# Altium PCB PCB_CSN_V4_1.PcbDoc
Units mil, origin at the board's own origin, x right, y up, seen from the top; angles counter-clockwise.
Board outline 3160 x 2075 mil, 2 copper layers (Top Layer, Bottom Layer); 94 components, 66 nets, 329 pads, 33 vias.
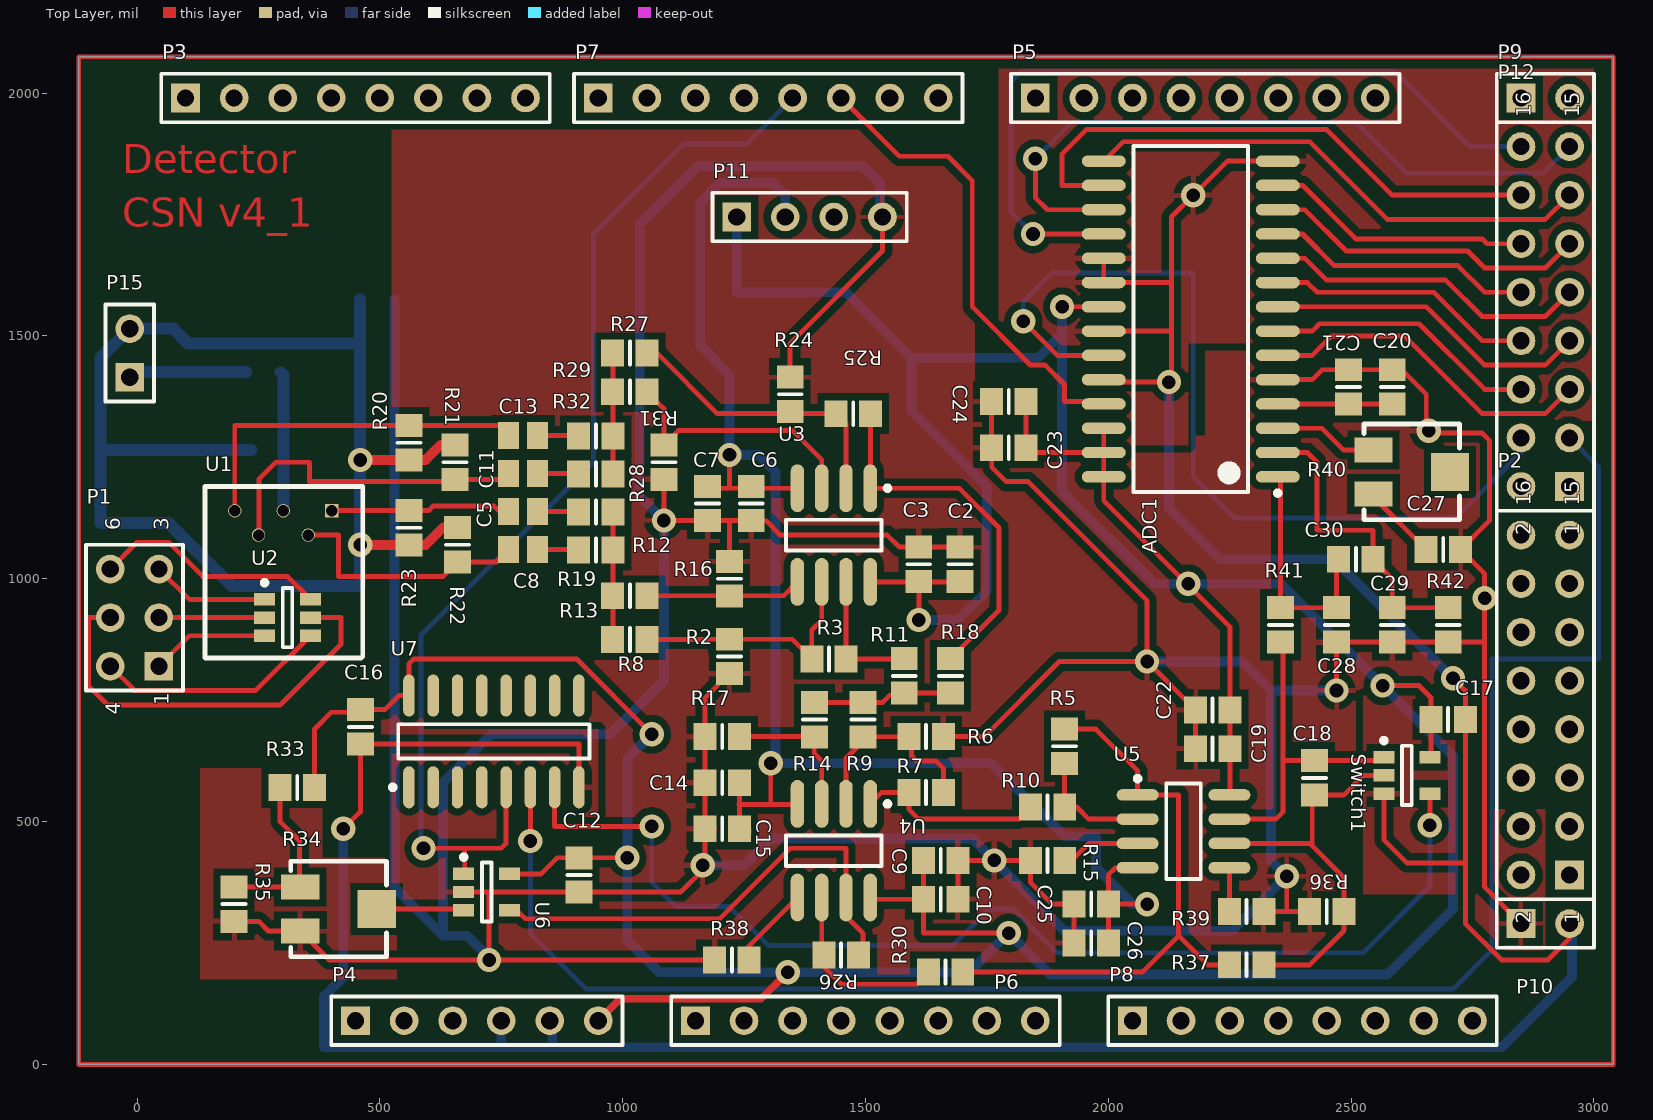
[diagram p0: Top Layer view]
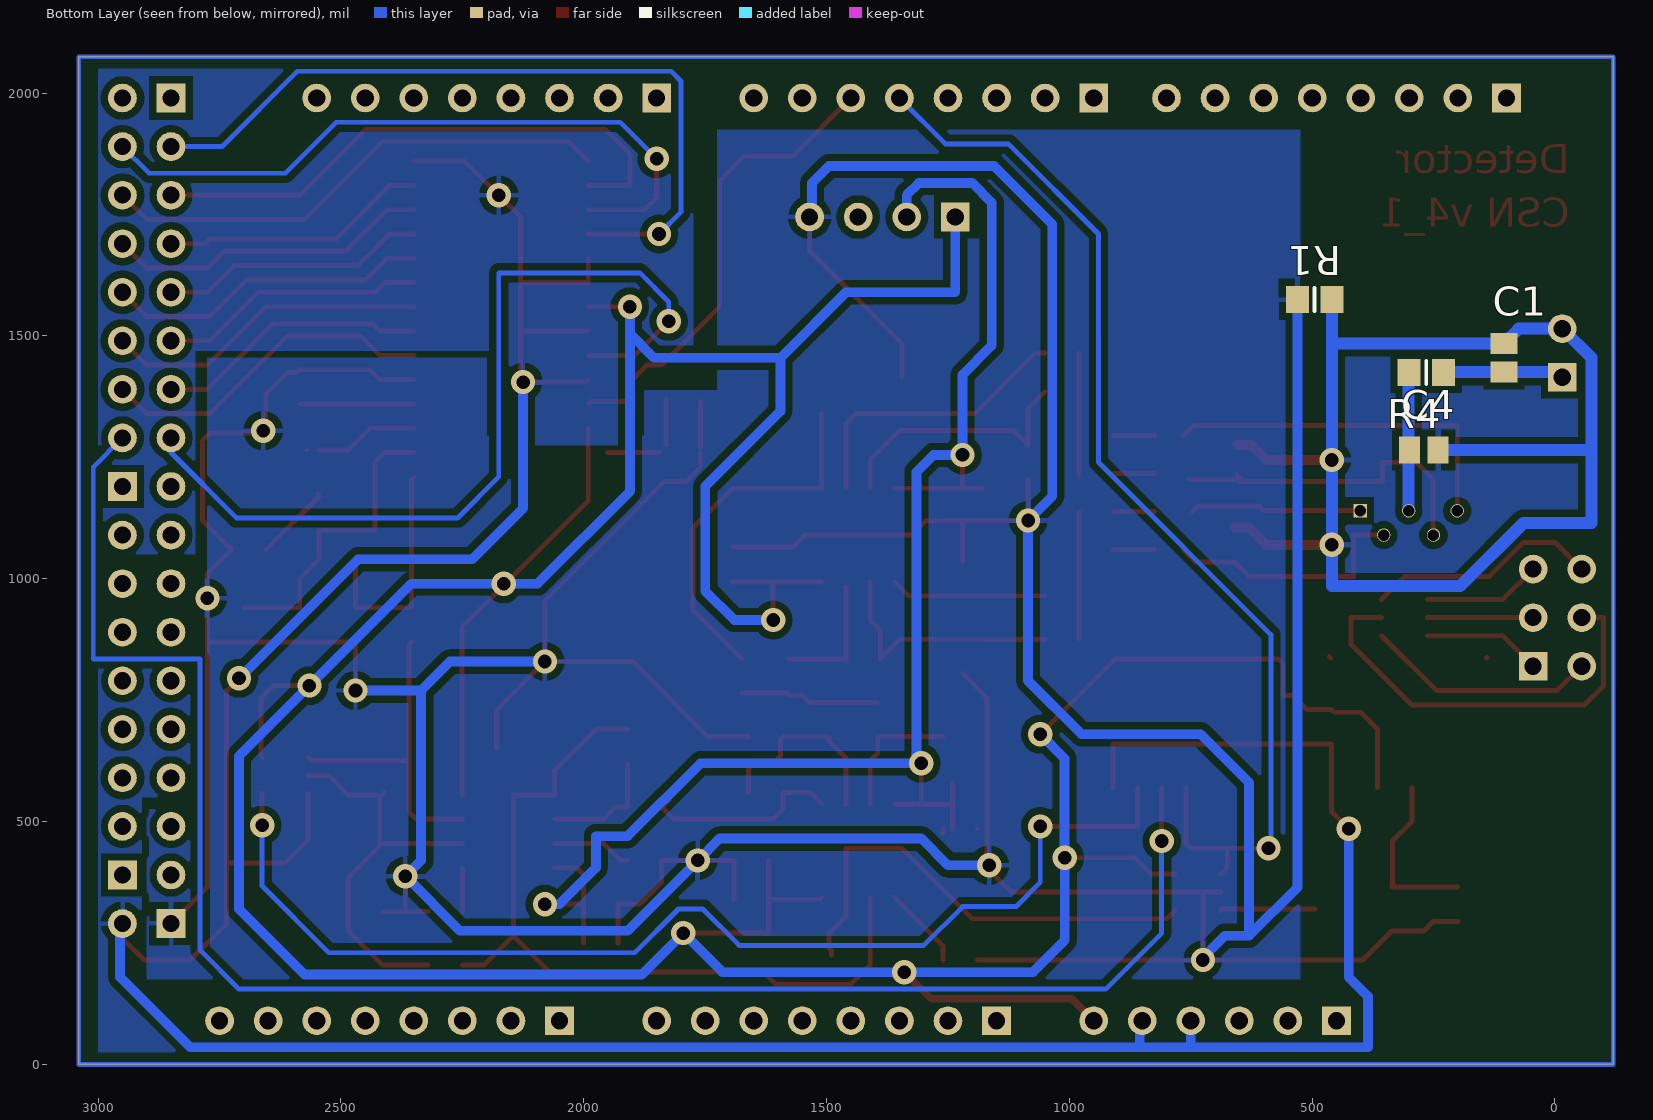
[diagram p1: Bottom Layer view, seen from below]

## Layer stack, top to bottom
Top Layer: signal copper 1.4
Dielectric: dielectric 12.6, FR-4, Dk 4.8
Bottom Layer: signal copper 1.4

## Board outline
-120,0 -120,2075 3040,2075 3040,0 -120,0

## Design rules (kind name [scope] priority, off if disabled: settings)
Clearance Clearance_1 [InPolygon] p1: gap=15
Clearance [InNetClass('All Nets') vs InNetClass('All Nets')] p2: gap=5
ComponentClearance ComponentClearance_1 [All] p1: gap=10 collisioncheckmode=3 verticalgap=10 showdistances=FALSE
PolygonConnect [All] p1: connectstyle=Relief reliefconductorwidth=10 reliefentries=4 polygonreliefangle="90 Angle"
RoutingVias [All] p1: holewidth=28 width=50 viastyle="Through Hole" minholewidth=28 minwidth=50 maxholewidth=28 maxwidth=50
SilkscreenOverComponentPads [All] p1: minsilkscreentomaskgap=10
SolderMaskExpansion [All] p1: expansion=4
Width Width_2 [(InNet('-5') OR InNet('+5') OR InNet('GND') OR InNet('DGND'))] p1: maxlimit=20 minlimit=10 preferedwidth=15 minimp=50.000000 maximp=50.000000 favimp=50.000000
Width [(InNet('70_GND') OR InNet('+70V') OR InNet('NetC4_2'))] p2: maxlimit=25 minlimit=20 preferedwidth=20 minimp=50.000000 maximp=50.000000 favimp=50.000000
Width Width_1 [All] p3: maxlimit=10 minlimit=10 preferedwidth=10
26 further rules are at their usual default settings.

## Classes and differential pairs
net class potencia: +5 -5 GND
component class Logica_ADC: ADC1 C16 C17 C18 C19 C20 C21 C22 C23 C24 C25 C26 C27 C28 C29 C30 P2 P3 P4 P5 P6 P7 P8 P9 P10 P11 P12 R36 R37 R39 R40 R41 R42 Switch1 U7
component class Acond_Elec: C1 C2 C3 C4 C5 C6 C7 C8 C9 C10 C11 C12 C13 C14 C15 P1 P15 R1 R2 R3 R4 R5 R6 R7 R8 R9 R10 R11 R12 R13 R14 R15 R16 R17 R18 R19 R20 R21 R22 R23 R24 R25 R26 R27 R28 R29 R30 R31 R32 R33 R34 R35 R38 U1 U2 U3 U4 U5 U6
net class analog: NetADC1_4 NetC18_2 NetR26_2 NetR33_2 NetR34_W
net class digital: DGND NetADC1_18 NetADC1_23 NetADC1_25 NetSwitch1_4

## Components (designator, comment, footprint, x,y, rotation, side; value= is the part's Value field where it differs from the comment)
ADC1 "LTC1415" SO28_N 2170,1535 r180 top
C1 "Cap" C0805 105,1455 r270 bottom
C2 "Cap" 6-0805_N 1695,1030 r270 top
C3 "Cap Pol3" 6-0805_N 1610,1030 r90 top
C4 "Cap" C0805 270,1265 r0 bottom
C5 "Cap" C0805 795,1138.33 r0 top locked
C6 "Cap" 6-0805_N 1265,1155 r90 top
C7 "Cap Pol3" 6-0805_N 1175,1155 r90 top
C8 "Cap" C0805 795,1060 r0 top locked
C9 "Cap Pol3" 6-0805_N 1655,420 r0 top
C10 "Cap" 6-0805_N 1655,340 r180 top
C11 "Cap" C0805 795,1216.67 r0 top locked
C12 "Cap" 6-0805_N 910,390 r270 top
C13 "Cap" C0805 795,1295 r0 top locked
C14 "Cap" 6-0805_N 1205,580 r180 top
C15 "Cap Pol3" 6-0805_N 1205,485 r0 top
C16 "Cap" 6-0805_N 460,695 r270 top
C17 "Cap" 6-0805_N 2700,710 r180 top
C18 "Cap" 6-0805_N 2425,590 r90 top
C19 "Cap" 6-0805_N 2215,650 r0 top
C20 "Cap Pol3" 6-0805_N 2585,1395 r90 top
C21 "Cap" 6-0805_N 2495,1395 r270 top
C22 "Cap Pol3" 6-0805_N 2215,730 r180 top
C23 "Cap Pol3" 6-0805_N 1795,1270 r180 top
C24 "Cap" 6-0805_N 1795,1365 r0 top
C25 "Cap" 6-0805_N 1965,330 r180 top
C26 "Cap Pol3" 6-0805_N 1965,250 r0 top
C27 "Cap" 6-0805_N 2690,1060 r0 top
C28 "Cap" 6-0805_N 2470,905 r90 top
C29 "Cap" 6-0805_N 2585,905 r90 top
C30 "Cap" 6-0805_N 2510,1040 r180 top
P1 "Header 3X2A" HDR2X3_CEN 45,820 r90 top
P2 "Header 8X2" HDR2X8 2950,390 r90 top
P3 "Header 8" HDR1X8 100,1990 r0 top
P4 "Header 6" HDR1X6 450,90 r0 top
P5 "Header 8" HDR1X8 1850,1990 r0 top
P6 "Header 8" HDR1X8 1150,90 r0 top
P7 "Header 8" HDR1X8 950,1990 r0 top
P8 "Header 8" HDR1X8 2050,90 r0 top
P9 "Header 2" HDR1X2 2850,1990 r0 top
P10 "Header 2" HDR1X2 2850,290 r0 top
P11 "Header 4" HDR1X4 1235,1745 r0 top
P12 "Header 8X2" HDR2X8 2950,1190 r90 top
P15 "Header 2" HDR1X2 -15,1415 r90 top
R1 "Res3" 6-0805_N 495,1575 r180 bottom
R2 "Res3" 6-0805_N 1220,840 r90 top
R3 "Res3" 6-0805_N 1425,835 r180 top
R4 "Res3" 6-0805_N 265,1425 r180 bottom
R5 "Res3" 6-0805_N 1910,655 r90 top
R6 "Res3" 6-0805_N 1625,675 r180 top
R7 "Res3" 6-0805_N 1625,560 r0 top
R8 "Res3" 6-0805_N 1015,875 r0 top
R9 "Res3" 6-0805_N 1495,710 r270 top
R10 "Res3" 6-0805_N 1875,530 r0 top
R11 "Res3" 6-0805_N 1580,800 r270 top
R12 "Res3" 6-0805_N 945,1137.43 r0 top locked
R13 "Res3" 6-0805_N 1015,965 r0 top
R14 "Res3" 6-0805_N 1395,710 r270 top
R15 "Res3" 6-0805_N 1875,420 r0 top
R16 "Res3" 6-0805_N 1220,1000 r270 top
R17 "Res3" 6-0805_N 1205,675 r0 top
R18 "Res3" 6-0805_N 1675,800 r270 top
R19 "Res3" 6-0805_N 945,1059.09 r0 top locked
R20 "Res3" 6-0805_N 560,1280 r90 top locked
R21 "Res3" 6-0805_N 655,1240 r270 top locked
R22 "Res3" 6-0805_N 660,1070 r270 top locked
R23 "Res3" 6-0805_N 560,1105 r90 top locked
R24 "Res3" 6-0805_N 1345,1380 r270 top
R25 "Res3" 6-0805_N 1475,1340 r180 top
R26 "Res3" 6-0805_N 1450,225 r0 top
R27 "Res3" 6-0805_N 1015,1465 r0 top
R28 "Res3" 6-0805_N 945,1215.76 r0 top locked
R29 "0" 6-0805_N 1015,1385 r0 top
R30 "Res3" 6-0805_N 1665,190 r180 top
R31 "Res3" 6-0805_N 1085,1240 r90 top
R32 "Res3" 6-0805_N 945,1294.09 r0 top locked
R33 "Res3" 6-0805_N 330,570 r180 top
R34 "RPot SM" POT4MM-2 415,320 r0 top
R35 "Res3" 6-0805_N 200,330 r90 top
R36 "Res3" 6-0805_N 2450,315 r180 top
R37 "Res3" 6-0805_N 2285,205 r0 top
R38 "Res3" 6-0805_N 1225,215 r0 top
R39 "Res3" 6-0805_N 2285,315 r180 top
R40 "RPot SM" POT4MM-2 2625,1220 r0 top
R41 "Res3" 6-0805_N 2355,905 r90 top
R42 "Res3" 6-0805_N 2700,905 r90 top
Switch1 "SN74LVC1G66DBVR" SOT23-5_N 2615,595 r0 top
U1 "MPPC_S10985" S10985_HAM 140,1190 r0 top
U2 "LM73CIMK-0" MK06A_N 310,920 r0 top
U3 "AD8002" SO-8_M 1435,1090 r270 top
U4 "AD8002" SO-8_M 1435,440 r270 top
U5 "THS4062" S8_N 2155,480 r0 top
U6 "ADCMP600" SOT23-5_N 720,355 r0 top
U7 "SN74LS279AD" D016_N 735,665 r90 top

## Footprints (in the part's own frame and the unit in brackets; to place one, negate y for a bottom-side part, rotate by r counter-clockwise, add the part's x,y. Pads: shape width x height; smd on the part's side, far side on the other; paste and mask are expansions set on the pad)
6-0805_N [mm] "Chip Resistor, Body 2.0x1.2mm, IPC Medium Density"
  rect 1.2x1.4 smd: 1(-0.9,0) 2(0.9,0)
  silkscreen extent 0,-0.6 0,0.6, body extent -1.07,-0.7 1.07,0.7, height 0.7
C0805 [mm] "Chip Capacitor, Body 2.0x1.3mm, IPC High Density"
  rect 1.1x1.4 smd: 1(-0.75,0) 2(0.75,0)
  body extent -1.1,-0.72 1.1,0.72, height 1.4
D016_N [mm] "SOIC, 16-Leads, Body 9.9x3.9mm, Pitch 1.27mm, IPC Medium Density"
  oval 2.2x0.6 smd: 1(-2.4,4.445) 2(-2.4,3.175) 3(-2.4,1.905) 4(-2.4,0.635) 5(-2.4,-0.635) 6(-2.4,-1.905) 7(-2.4,-3.175) 8(-2.4,-4.445) 9(2.4,-4.445) 10(2.4,-3.175) 11(2.4,-1.905) 12(2.4,-0.635) 13(2.4,0.635) 14(2.4,1.905) 15(2.4,3.175) 16(2.4,4.445)
  silkscreen extent -2.52,-5 0.9,5.42, body extent -1.95,-4.95 1.95,4.95, height 1.75
HDR1X2 [mm] "Connector; Header; 2 Position"
  rect 1.5x1.5 hole 0.9: 1(0,0)
  round 1.5 hole 0.9: 2(2.54,0)
  silkscreen extent -1.27,-1.27 3.81,1.27
HDR1X4 [mm] "Connector; Header; 4 Position"
  rect 1.5x1.5 hole 0.9: 1(0,0)
  round 1.5 hole 0.9: 2(2.54,0) 3(5.08,0) 4(7.62,0)
  silkscreen extent -1.27,-1.27 8.89,1.27
HDR1X6 [mm] "Connector; Header; 6 Position"
  rect 1.5x1.5 hole 0.9: 1(0,0)
  round 1.5 hole 0.9: 2(2.54,0) 3(5.08,0) 4(7.62,0) 5(10.16,0) 6(12.7,0)
  silkscreen extent -1.27,-1.27 13.97,1.27
HDR1X8 [mm] "Connector; Header; 8 Position"
  rect 1.5x1.5 hole 0.9: 1(0,0)
  round 1.5 hole 0.9: 2(2.54,0) 3(5.08,0) 4(7.62,0) 5(10.16,0) 6(12.7,0) 7(15.24,0) 8(17.78,0)
  silkscreen extent -1.27,-1.27 19.05,1.27
HDR2X3_CEN [mm] "Connector; Header; 3x2 Position"
  rect 1.5x1.5 hole 0.9: 1(0,0)
  round 1.5 hole 0.9: 2(2.54,0) 3(5.08,0) 4(0,2.54) 5(2.54,2.54) 6(5.08,2.54)
  silkscreen extent -1.27,-1.27 6.35,3.81
HDR2X8 [mm] "Connector; Header; 8x2 Position"
  rect 1.5x1.5 hole 0.9: 1(0,0)
  round 1.5 hole 0.9: 2(0,2.54) 3(2.54,0) 4(2.54,2.54) 5(5.08,0) 6(5.08,2.54) 7(7.62,0) 8(7.62,2.54) 9(10.16,0) 10(10.16,2.54) 11(12.7,0) 12(12.7,2.54) 13(15.24,0) 14(15.24,2.54) 15(17.78,0) 16(17.78,2.54)
  silkscreen extent -1.27,-1.27 19.05,3.81
MK06A_N [mm] "SOT23, 6-Leads, Body 3.0x1.7mm, Pitch 0.95mm, Lead Span 2.9mm, IPC Medium Density"
  rect 1.1x0.65 smd: 1(-1.2,0.95) 2(-1.2,0) 3(-1.2,-0.95) 4(1.2,-0.95) 5(1.2,0) 6(1.2,0.95)
  silkscreen extent -1.32,-1.55 0.25,1.95, body extent -0.9,-1.55 0.9,1.55, height 1
POT4MM-2 [mm] "Square Trimming Potentiometer"
  rect 2x1.3 smd: CCW(-2,-1.15) CW(-2,1.15)
  rect 2x2 smd: W(2,0)
  silkscreen extent -2.5,-2.5 2.5,2.5
S8_N [mm] "SOIC, 8-Leads, Body 4.9x3.9mm, Pitch 1.27mm, IPC Medium Density"
  oval 2.2x0.6 smd: 1(-2.4,1.905) 2(-2.4,0.635) 3(-2.4,-0.635) 4(-2.4,-1.905) 5(2.4,-1.905) 6(2.4,-0.635) 7(2.4,0.635) 8(2.4,1.905)
  silkscreen extent -2.52,-2.5 0.9,2.88, body extent -2,-2.5 2,2.5, height 1.76
S10985_HAM [mm]
  rect 0.7x0.7 hole 0.6: 1(6.64,-1.27)
  round 0.7 hole 0.6: 2(5.4,-2.54) 3(4.1,-1.27) 4(2.8,-2.54) 5(1.56,-1.27)
  Top Layer lines w0.254: 0,-8.95 0.025,-8.975 ; 8.175,-8.975 8.25,-8.9
  silkscreen extent 0,-8.97 8.25,0
SO28_N [mm] "28-Pin Plastic Small Outline Integrated Circuit 1.27 mm Pitch, IPC Medium Density"
  oval 2.3x0.6 smd: 1(-4.55,8.255) 2(-4.55,6.985) 3(-4.55,5.715) 4(-4.55,4.445) 5(-4.55,3.175) 6(-4.55,1.905) 7(-4.55,0.635) 8(-4.55,-0.635) 9(-4.55,-1.905) 10(-4.55,-3.175) 11(-4.55,-4.445) 12(-4.55,-5.715) 13(-4.55,-6.985) 14(-4.55,-8.255) 15(4.55,-8.255) 16(4.55,-6.985) 17(4.55,-5.715) 18(4.55,-4.445) 19(4.55,-3.175) 20(4.55,-1.905) 21(4.55,-0.635) 22(4.55,0.635) 23(4.55,1.905) 24(4.55,3.175) 25(4.55,4.445) 26(4.55,5.715) 27(4.55,6.985) 28(4.55,8.255)
  silkscreen extent -4.67,-9.05 3,9.23, body extent -3.8,-9.06 3.8,9.06, height 2.65
SO-8_M [mm] "SOIC, 8-Leads, Body 4.9x3.9mm, Pitch 1.27mm, IPC Low Density"
  oval 2.5x0.7 smd: 1(-2.45,1.905) 2(-2.45,0.635) 3(-2.45,-0.635) 4(-2.45,-1.905) 5(2.45,-1.905) 6(2.45,-0.635) 7(2.45,0.635) 8(2.45,1.905)
  silkscreen extent -2.57,-2.5 0.8,2.93, body extent -2,-2.5 2,2.5, height 1.75
SOT23-5_N [mm] "SOT23, 5-Leads, Body 2.9x1.6mm, Pitch 0.95mm, Lead Span 2.8mm, IPC Medium Density"
  rect 1.1x0.65 smd: 1(-1.2,0.95) 2(-1.2,0) 3(-1.2,-0.95) 4(1.2,-0.95) 5(1.2,0.95)
  silkscreen extent -1.32,-1.55 0.25,1.95, body extent -0.9,-1.55 0.9,1.55, height 1.45

## Part data
C1 C2 C4 C5 C6 C8 C10 C11 C12 C13 C14 C16 C17 C18 C19 C21 C24 C25 C27 C28 C29 C30: "Capacitor"
C3 C7 C9 C15 C20 C22 C23 C26: "Polarized Capacitor (Surface Mount)"
P1: "Header, 3-Pin, Dual row"
P2 P12: "Header, 8-Pin, Dual row"
P3 P5 P6 P7 P8: "Header, 8-Pin"
P4: "Header, 6-Pin"
P9 P10 P15: "Header, 2-Pin"
P11: "Header, 4-Pin"
R1 R2 R3 R4 R5 R6 R7 R8 R9 R10 R11 R12 R13 R14 R15 R16 R17 R18 R19 R20 R21 R22 R23 R24 R25 R26 R27 R28 R30 R31 R32 R33 R35 R36 R37 R38 R39 R41 R42: "Resistor"
R29: library part Res3, "Resistor"
R34 R40: "Square Trimming Potentiometer"
U2: "2.7V, 11- to 14- Bit Digital Temperature Sensor with 2-Wire Interface, 6-pin Tiny SOT23"
U3 U4: library part AD8002AR, "Dual 600MHz, 50mW Current Feedback Amplifier"
U5: library part LT1253CS8, "Low Cost Dual Video Amplifier"
U7: "Quadruple S-R Latches"

## Via types
v1: diameter 50, hole 28, Top Layer to Bottom Layer, 33 vias

## Nets (pads, with @x,y where several pads share a name; then routed paths per layer and width w, separated by ;. In a path a pad name is that pad's centre, name@x,y a point inside that pad or via, vN(x,y) a via of type N, cw(c..) or ccw(c..) an arc to the next point about the centre after c; other vN are vias at no path point)
70_GND: C1.1 C4.1 P15.2 R1.2 R20.1 R21.1 R22.1 R23.1 | length 2819.1
  Top Layer w20: v1(459.57,1244.57) R20.1 594.57,1244.57 625.43,1275.43 R21.1 ; v1@465,1070 465.43,1069.57 R23.1 594.57,1069.57 630.43,1105.43 R22.1
  Bottom Layer w25: C4.1@235.47,1265 -75,1265 ; R1.2 459.57,1484.57 ; -75,1265 -75,1115 65,1115 195,985 459.53,985 459.53,1484.53 ; -75,1265 -75,1455 P15.2 74.53,1515 C1.1 459.53,1484.53
  other v1: 459.57,1070
+5: ADC1.21 ADC1.26 ADC1.27 ADC1.28 C2.2 C3.1 C9.1 C10.2 C12.1 C16.1 C17.2 C19.2 C22.1 C23.1 C24.2 P4.6 P11.1 R33.1 Switch1.5 U3.8 U4.8 U5.8 U6.5 U7.16 | length 9367.3
  Top Layer w10: R33.1 365.43,690.43 400,725 454.57,725 C16.1 510.43,730.43 539.49,759.49 U7.16 560,825 570,835 905,835 v1(1060,680) ; U6.5@782.24,392.4 832.4,392.4 865.43,425.43 C12.1 v1(1009.57,425.43) ; U4.8 1513.54,340 C10.2 ; U3.8 C3.1@1610,993.54 ; v1(1610,915) C3.1@1610,993.54 ; C3.1 C3.1@1610,993.54 ; C9.1 C10.2 ; C2.2 1693.98,993.54 C3.1@1610,993.54 ; v1(1795,270.43) 1619.57,270.43 C10.2 ; C23.1@1830.43,1275 C24.2 C24.2@1830.43,1370 ; C23.1@1845.44,1260 ADC1.27@1950.87,1260 ; v1(1905,1560) ADC1.21 ; ADC1.26 ADC1.27 ADC1.28 1990.87,1160.87 2250.43,901.3 C22.1 2250.43,555.94 U5.8 ; v1(2565,780) 2640,780 2664.57,755.43 C17.2 2664.57,634.72 Switch1.5
  Top Layer w15: P4.6 995,135 1285,135 v1(1340,190)
  Bottom Layer w20: v1(1009.57,425.43) 1009.57,255.43 1075,190 v1(1340,190) 1714.57,190 v1(1795,270.43) 1880.43,185 2575,185 2710,320 2710,635 v1(2565,780) 2355,990 v1(2165,990) 2095,990 1905,1180 1905,1505 ; v1@1010,425.87 1010,630 v1(1060,680) ; P11.1 1235,1590 1460,1590 1595,1455 ; v1(1610,915) 1690,915 1750,975 1750,1190 1595,1345 1595,1455 ; v1(1905,1560) 1905,1505 ; 1595,1455 1855,1455 1905,1505
+70V: C1.2 P15.1 R4.2 | length 244.1
  Bottom Layer w25: P15.1 -4.53,1425.47 C1.2 224.09,1425.47 R4.2@224.57,1425
-5: C6.2 C7.2 C14.1 C15.2 C25.1 C26.2 P11.2 U3.4 U4.4 U5.4 | length 3270.8
  Top Layer w10: C7.2@1178.98,1186.46 1220,1186.46 ; v1(1220,1255) 1220,1186.46 ; 1240,535 1240.43,535 ; C15.2 1240.43,535 ; C14.1 1240.43,535 ; C15.2@1260.43,475 C15.2@1260.43,485 ; v1(1305,620) 1305,535 ; U4.4 1358.54,535 1305,535 ; U3.4 1220,1186.46 ; C26.2 C25.1 ; U5.4 2015,405 2000.43,390.43 C25.1 ; v1(2080,330) C25.1 ; 1240.43,535 1305,535
  Bottom Layer w20: v1(1305,620) 1760,620 1910,470 1975,470 1975,405 2050,330 v1(2080,330) ; v1@1315,630 1315,1220 1280,1255 v1(1220,1255) 1220,1420 1160,1480 1160,1775 1200,1815 1310,1815 1335,1790 P11.2
DGND: ADC1.14 ADC1.19 ADC1.20 ADC1.22 ADC1.24 C16.2 C17.1 P4.4 P4.5 P10.2 Switch1.3 U7.8 | length 7200.7
  Top Layer w10: v1(425,485) 460,520 C16.2 910,659.57 U7.8 ; ADC1.24 1995.87,1405 v1(2125,1405) 2130,1405 2130,1510 ; ADC1.22 2130,1510 ; ADC1.19 ADC1.20 2130,1610 ; ADC1.14 2245,1860 v1(2175,1790) 2130,1745 2130,1610 ; Switch1.3 2567.76,462.24 2615,415 2735.43,415 ; v1(2710,795) 2735.43,769.57 C17.1 2735.43,415 ; P10.2 2950,260 2905,215 2810,215 2735.43,289.57 2735.43,415 ; 2130,1510 2130,1610
  Bottom Layer w20: v1(425,485) 425,180 385,140 385,35 750,35 ; P4.4 750,35 ; P4.5@855,85 855,35 ; v1(2125,1405) 2125,1145 2230,1040 2465,1040 v1(2710,795) ; P10.2 2955,285 2955,180 2810,35 855,35 ; 750,35 855,35
GND: ADC1.5 C2.1 C3.2 C6.1 C7.1 C9.2 C10.1 C12.2 C14.2 C15.1 C19.1 C20.2 C21.1 C22.2 C23.2 C24.1 C25.2 C26.1 C27.2 C28.1 C29.1 P10.1 P11.4 R1.1 R2.1 R6.1 R15.1 R16.1 R17.1 R24.1 R31.1 R34.CCW R35.1 R36.2 R38.1 R39.1 R42.1 U6.2 | length 13434.2
  Top Layer w10: R35.1 250.43,294.57 270.28,274.72 R34.CCW 395.98,215 R38.1 ; U6.2@687.76,355 725,355 ; v1(725,215) 730,215 735,220 725,230 725,355 ; C12.2 C12.2@909.57,355 ; R31.1 v1(1085,1120) 1175,1120 1264.57,1120 C6.1 1295.43,1119.57 1325,1090 1545,1090 1569.57,1065.43 C3.2 C2.1 ; R2.1@1220,805 1170,755 1170,405 1120,355 C12.2@909.57,355 ; R16.1 1220,1119.78 ; R24.1 1345,1485 1535,1675 P11.4 ; R6.1 1745,675 1899.57,829.57 v1(2080,829.57) ; C10.1 C9.2 v1(1765,420) R15.1 1839.57,375.43 1885,330 C25.2 C26.1 ; C23.2 C24.1 ; C23.2@1760,1260 1760,1230 1790,1200 1835,1200 2080,955 v1(2080,829.57) ; C19.1 C22.2 v1(2080,829.57) ; R39.1 2367.5,315 ; ADC1.5 2420,1410 2440.43,1430.43 C21.1 C20.2 2590.43,1425 2610,1425 2655,1380 2655,1310 2665,1300 2770,1300 2785,1285 2785,1119.57 C27.2 2775,1010.43 2775,870 2774.57,869.57 ; v1(2367.5,387.5) 2367.5,315 ; R36.2 2367.5,315 ; v1(2470,770) C28.1 C29.1 R42.1 2774.57,869.57 ; P10.1 2774.57,365.43 2774.57,869.57 ; 725,355 C12.2@909.57,355
  Bottom Layer w20: R1.1 530.43,364.57 630,265 ; v1(725,215) 730,215 680,265 630,265 ; v1(1165,410) 1250,410 1305,465 1720,465 v1(1765,420) 1910,275 2255,275 v1(2367.5,387.5) 2335,420 2335,770 ; P11.4 1530,1750 1530,1815 1495,1850 1155,1850 1035,1730 1035,1170 v1(1085,1120) 1085,790 975,680 730,680 630,580 630,265 ; v1(2080,829.57) 2275.43,829.57 2335,770 ; v1(2470,770) 2335,770
  other v1: 2775,960 2660,1305
NetADC1_1: ADC1.1 C28.2 C30.2 R41.2 | length 482
  Top Layer w10: ADC1.1 2355,1204.13 R41.2 C28.2 C30.2@2470,1035.43
NetADC1_2: ADC1.2 C29.2 C30.1 R42.2 | length 635.3
  Top Layer w10: ADC1.2 2410,1260 2430,1240 2430,1100 2545,1100 2545,1090 2545.43,1089.57 C30.1 2585,1000.43 C29.2 R42.2
NetADC1_3: ADC1.3 R40.CW | length 216.3
  Top Layer w10: ADC1.3 2440,1310 2485,1265 2545.98,1265 R40.CW ; R40.CW@2570.98,1265 R40.CW@2571.26,1265.28
NetADC1_4: ADC1.4 C20.1 C21.2 | length 236
  Top Layer w10: ADC1.4 2494.57,1360 C21.2 C20.1
NetADC1_6: ADC1.6 P12.5 | length 704.4
  Top Layer w10: ADC1.6 2420,1460 2460,1500 2610,1500 2770,1340 2900,1340 P12.5
NetADC1_7: ADC1.7 P12.6 | length 563
  Top Layer w10: ADC1.7 2420,1510 2435,1525 2640,1525 2775,1390 P12.6
NetADC1_8: ADC1.8 P12.7 | length 671.3
  Top Layer w10: ADC1.8 2655,1560 2775,1440 2900,1440 P12.7
NetADC1_9: ADC1.9 P12.8 | length 550.6
  Top Layer w10: ADC1.9 2410,1610 2430,1590 2670,1590 2770,1490 P12.8
NetADC1_10: ADC1.10 P12.9 | length 671.3
  Top Layer w10: ADC1.10 2405,1660 2450,1615 2695,1615 2770,1540 2900,1540 P12.9
NetADC1_11: ADC1.11 P12.10 | length 550.6
  Top Layer w10: ADC1.11 2400,1710 2465,1645 2720,1645 2775,1590 P12.10
NetADC1_12: ADC1.12 P12.11 | length 671.3
  Top Layer w10: ADC1.12 2405,1760 2490,1675 2740,1675 2775,1640 2900,1640 P12.11
NetADC1_13: ADC1.13 P12.12 | length 550.6
  Top Layer w10: ADC1.13 2400,1810 2510,1700 2770,1700 2780,1690 P12.12
NetADC1_15: ADC1.15 P12.13 | length 1062.7
  Top Layer w10: ADC1.15 2030.87,1900 2415,1900 2575,1740 2900,1740 P12.13
NetADC1_16: ADC1.16 P12.14 | length 1172.5
  Top Layer w10: ADC1.16 1905,1810 1905,1875 1955,1925 2450,1925 2585,1790 P12.14
NetADC1_17: ADC1.17 P12.15 | length 1428.6
  Top Layer w10: v1(1850,1865) 1850,1785 1875,1760 ADC1.17
  Bottom Layer w10: v1(1850,1865) 1925,1940 2510,1940 2615,1835 2895,1835 P12.15
NetADC1_18: ADC1.18 P12.16 | length 1602
  Top Layer w10: v1(1845,1710) ADC1.18
  Bottom Layer w10: v1(1845,1710) 1800,1755 1800,2025 1820,2045 2590,2045 2745,1890 P12.16
NetADC1_23: ADC1.23 P12.4 | length 1825.8
  Top Layer w10: v1(1825,1530) 1895,1460 ADC1.23
  Bottom Layer w10: v1(1825,1530) 1825,1570 1885,1630 2175,1630 2175,1210 2260,1125 2715,1125 2850,1260 P12.4
NetADC1_25: ADC1.25 P7.6 | length 974.6
  Top Layer w10: P7.6 1570,1870 1670,1870 1720,1820 1720,1560 1840,1440 1870,1440 1910,1400 1910,1365 1985.87,1365 ADC1.25
NetC4_2: C4.2 R4.1 U1.3 | length 287.5
  Bottom Layer w25: R4.1@295.43,1425 301.42,1419.01 U1.3
NetC5_1: C5.1 R23.2 U1.1 | length 353.6
  Top Layer w10: U1.1@401.85,1140.43 R23.2 600.43,1140.43 610,1150 735,1150 C5.1@746.67,1138.33
NetC5_2: C5.2 R12.1 | length 85.4
  Top Layer w10: C5.2 908.66,1138.33 R12.1
NetC8_1: C8.1 R22.2 U1.2 | length 520.7
  Top Layer w10: U1.2 415,1090 415,1005 630.43,1005 R22.2 740.04,1034.57 C8.1
NetC8_2: C8.2 R19.1 | length 85.4
  Top Layer w10: C8.2 908.66,1060 R19.1
NetC11_1: C11.1 R21.2 U1.4 | length 680.2
  Top Layer w10: U1.4@250.95,1090.71 250.95,1205 285.95,1240 355,1240 355,1200 R21.2@650.43,1200 ; R21.2@645.43,1205 R21.2@655,1214.57 ; R21.2 C11.1@753.37,1204.57
NetC11_2: C11.2 R28.1 | length 85.4
  Top Layer w10: C11.2 908.66,1216.67 R28.1
NetC13_1: C13.1 R20.2 U1.5 | length 748
  Top Layer w10: U1.5 201.42,1315.43 R20.2 745.04,1315.43 C13.1
NetC13_2: C13.2 R32.1 | length 85.4
  Top Layer w10: C13.2 908.66,1295 R32.1
NetC18_1: C18.1 R36.1 R37.2 Switch1.2 U5.6 | length 841.6
  Top Layer w10: U5.6 2415,455 ; R37.2 2415,205 2485.43,275.43 R36.1 2485.43,384.57 2415,455 ; C18.1@2410,559.57 2420,549.57 2420,455 2415,455 ; C18.1 2484.57,554.57 2525,595 Switch1.2
NetC18_2: C18.2 R41.1 Switch1.1 U5.7 | length 679.2
  Top Layer w10: U5.7 2345,505 2360,520 2360,625 ; R41.1 2360,864.57 2360,625 ; Switch1.1 2560.79,625.43 C18.2 2360.43,625.43 2360,625
NetC27_1: C27.1 R40.CCW | length 159.6
  Top Layer w10: R40.CCW 2546.26,1168.31 C27.1
NetP1_1: P1.1 U2.3 | length 243.7
  Top Layer w10: P1.1 107.6,882.6 U2.3
NetP1_2: P1.2 U2.2 | length 217.8
  Top Layer w10: P1.2 U2.2
NetP1_3: P1.3 U2.1 | length 243.7
  Top Layer w10: P1.3 107.6,957.4 U2.1
NetP1_4: P1.4 U2.4 | length 479.6
  Top Layer w10: P1.4 -5,770 244.65,770 U2.4
NetP1_5: P1.5 U2.5 | length 891.1
  Top Layer w10: P1.5 -100,920 -100,780 -60,740 295,740 420,865 420,920 U2.5
NetP1_6: P1.6 U2.6 | length 483.7
  Top Layer w10: P1.6 0,1075 65,1075 135,1005 309.65,1005 U2.6
NetP7_5: P7.5 U6.1 U7.5 | length 2308.8
  Top Layer w10: v1(590,445) 750,445 760,455 U7.5 ; 675,445 675,405.16 U6.1@687.76,392.4
  Bottom Layer w10: v1(590,445) 605,445 585,465 585,885 940,1240 940,1710 1125,1895 1255,1895 P7.5
NetP12_3: P12.3 U7.6 | length 3661.1
  Top Layer w10: v1@810,470 U7.6
  Bottom Layer w10: v1@810,470 810,270 925,155 2710,155 2790,235 2790,835 3010,835 3010,1230 P12.3
  other v1: 810,460
NetR2_2: R2.2 R3.2 R8.2 U3.6 | length 523.1
  Top Layer w10: R8.2 1174.57,875 1175,875.43 1349.13,875.43 R3.2 1389.57,894.57 1410,915 U3.6
NetR3_1: R3.1 R11.1 U3.7 | length 272.2
  Top Layer w10: R3.1@1460,830 U3.7@1460,983.11 ; R3.1 R11.1@1579.57,835
NetR5_1: R5.1 R10.2 U5.2 | length 250.2
  Top Layer w10: R5.1 1910,530.43 R10.2 1935,530 1960,505 U5.2
NetR5_2: R5.2 R30.1 R37.1 U5.1 | length 1215.1
  Top Layer w10: R30.1 2070,190 2145,265 ; R5.2 1974.57,690.43 2060.51,604.49 U5.1 2145,555 2145,265 ; R37.1 2205,205 2145,265
NetR6_2: R6.2 R7.2 R9.2 U4.2 | length 415.1
  Top Layer w10: U4.2 1460,630 1495,665 R9.2 1589.13,674.57 R6.2 1595,669.57 1595,635 1605,625 1645,625 1660.43,609.57 R7.2
NetR7_1: R7.1 R10.1 U4.1 | length 413.9
  Top Layer w10: U4.1 1533.54,560 R7.1 1589.57,525.43 1610,505 1814.57,505 R10.1 R10.1@1824.57,545
NetR8_1: R8.1 R12.2 R13.1 R19.2 | length 261.6
  Top Layer w10: R8.1@980.43,875.87 R19.2 R12.2
NetR9_1: R9.1 R11.2 R14.1 R18.2 | length 287.9
  Top Layer w10: R14.1 R9.1 1535.43,745.43 1550,760 1575.43,760 R11.2 R18.2
NetR13_2: R13.2 R16.2 U3.5 | length 321.4
  Top Layer w10: R13.2 1331.46,965 U3.5
NetR14_2: R14.2 R17.2 U4.3 | length 279.5
  Top Layer w10: R17.2@1260,675 1394.57,675 1394.57,640.43 1410,625 U4.3
NetR15_2: R15.2 U5.3 | length 164.6
  Top Layer w10: R15.2 1925,420 1960,455 U5.3
NetR18_1: R18.1 R25.1 U3.1 | length 763.5
  Top Layer w10: R25.1 1510.43,1186.89 U3.1 1693.54,1186.46 1775,1105 1775,935.43 R18.1
NetR24_2: R24.2 R25.2 R27.2 U3.2 | length 602.9
  Top Layer w10: R27.2 1070,1465 1195,1340 R25.2 1460,1319.57 U3.2
NetR26_1: R26.1 R30.2 U4.6 | length 385
  Top Layer w10: U4.6 1410,205 1450,165 1604.57,165 R30.2
NetR26_2: R26.2 U4.7 U6.4 | length 981.7
  Top Layer w10: U6.4@782.24,317.6 799.84,300 1200,300 1345,445 1460,445 U4.7 1460,305 1495,270 1495,240 1490,235 R26.2@1490,225
NetR27_1: R27.1 R28.2 R29.1 R32.2 | length 248.4
  Top Layer w10: R28.2 R32.2 R27.1@980.43,1464.13
NetR29_2: R29.2 R31.2 U3.3 | length 544.5
  Top Layer w10: R29.2 1085,1350.43 R31.2 1114.57,1305 1350,1305 1410,1245 U3.3
NetR33_2: R33.2 R34.CW R35.2 | length 357.5
  Top Layer w10: R35.2@200.16,365.28 R34.CW 334.57,366.97 334.57,460.43 295,500 ; 294.57,500.43 R33.2
NetR34_W: R34.W U6.3 | length 195
  Top Layer w10: R34.W 685.35,320 U6.3@687.76,317.6
NetR38_2: R38.2 U4.5 | length 169.8
  Top Layer w10: R38.2 1260.43,243.98 U4.5
NetR39_2: R39.2 U5.5 | length 90
  Top Layer w10: U5.5 2249.49,315.08 R39.2
NetSwitch1_4: Switch1.4 U7.7 | length 2367.2
  Top Layer w10: U7.7 860,490 v1(1060,490) ; v1(2662.24,492.24) Switch1.4
  Bottom Layer w10: v1(1060,490) 1060,375 1110,325 1220,325 1300,245 1680,245 1755,320 1805,320 1895,230 2525,230 2662.24,367.24 v1(2662.24,492.24)
pads on no net: P2.1 P2.2 P2.3 P2.4 P2.5 P2.6 P2.7 P2.8 P2.9 P2.10 P2.11 P2.12 P2.13 P2.14 P2.15 P2.16 P3.1 P3.2 P3.3 P3.4 P3.5 P3.6 P3.7 P3.8 P4.1 P4.2 P4.3 P5.1 P5.2 P5.3 P5.4 P5.5 P5.6 P5.7 P5.8 P6.1 P6.2 P6.3 P6.4 P6.5 P6.6 P6.7 P6.8 P7.1 P7.2 P7.3 P7.4 P7.7 P7.8 P8.1 P8.2 P8.3 P8.4 P8.5 P8.6 P8.7 P8.8 P9.1 P9.2 P11.3 P12.1 P12.2 R40.W U7.1 U7.2 U7.3 U7.4 U7.9 U7.10 U7.11 U7.12 U7.13 U7.14 U7.15

## Polygon pours and split planes (outlines as drawn)
DGND on Top Layer "dgnd_adc" (solid, remove dead copper, pour order 28): 1775,2050 1775,1425 1895,1425 1895,1275 2165,1275 2165,1465 2165,1485 2750,1485 2775,1485 2775,1325 3000,1325 3000,2050 1775,2050
DGND on Top Layer "dgnd_switch" (solid, remove dead copper, pour order 29): 2750,825 2750,350 2525,350 2525,820 2520,825
DGND on Top Layer "Top Layer-DGND" (solid, remove dead copper, pour order 30): 590,860 510,860 510,775 415,775 415,620 740,620 740,505 950,505 950,690 590,690 590,860
GND on Top Layer "gnd_top_2" (solid, remove dead copper, pour order 37): 535,423.6 533.57,425 381.2,425 381.2,600 370.95,610 130,610 130,175 535,175 535,423.6
GND on Top Layer "gnd_top" (solid, remove dead copper, pour order 34): 525,1925 525,175 2900,175 2900,525 2775,525 2775,1481.67 2200,1481.67 2200,1295 1875,1295 1875,1388.33 1725,1388.33 1725,1925
DGND on Bottom Layer "dgnd_adc_bottom" (solid, remove dead copper, pour order 31): 1775,2050 1775,1440 1900,1440 1900,1275 2165,1275 2165,1485 2165,1470 2800,1470 2800,1050 3010,1050 3000,1060 3000,2050
DGND on Bottom Layer "dgnd_bottom" (solid, remove dead copper, pour order 32): 2800,1050 2800,550 2910,550 2910,150 445,150 445,450 390,450 390,25 3000,25 3000,1049.8 2999.8,1050
GND on Bottom Layer "gnd_bottom" (solid, remove dead copper, pour order 33): 525,1925 525,175 2900,175 2900,525 2775,525 2775,1481.67 2200,1481.67 2200,1295 1875,1295 1875,1388.33 1725,1388.33 1725,1925
70_GND on Bottom Layer "gnd_bottom" (solid, remove dead copper, pour order 41): -75,1525 455,1525 455,989.53 459.53,985 195,985 65,1115 -75,1115 -75,1520

## Other copper
Top Layer:
  text "Detector" at -30,1835 h60
  text "CSN v4_1" at -30,1725 h60
Multi-Layer:
  the board outline again, w10

## Text inside footprints (layer, text, board x,y; h text height)
P1: Top Overlay "6" at -35,1100 h30 r90; Top Overlay "3" at 65,1100 h30 r90; Top Overlay "1" at 65,740 h30 r90; Top Overlay "4" at -35,720 h30 r90
P2: Top Overlay "2" at 2870,290 h30 r90; Top Overlay "1" at 2970,290 h30 r90; Top Overlay "15" at 2970,1150 h30 r90; Top Overlay "16" at 2870,1150 h30 r90
P12: Top Overlay "2" at 2870,1090 h30 r90; Top Overlay "1" at 2970,1090 h30 r90; Top Overlay "15" at 2970,1950 h30 r90; Top Overlay "16" at 2870,1950 h30 r90